# Altium PCB PCBKvant3DPrinter_TopologicalSort.PcbDoc (part 1 of 2)
Units mm, origin at the board's own origin, x right, y up, seen from the top; angles counter-clockwise.
Board outline 112.65 x 119.38 mm, 2 copper layers (Top Layer, Bottom Layer); 226 components, 215 nets, 744 pads, 71 vias.
Unrouted connection lines stored in the file: 213.
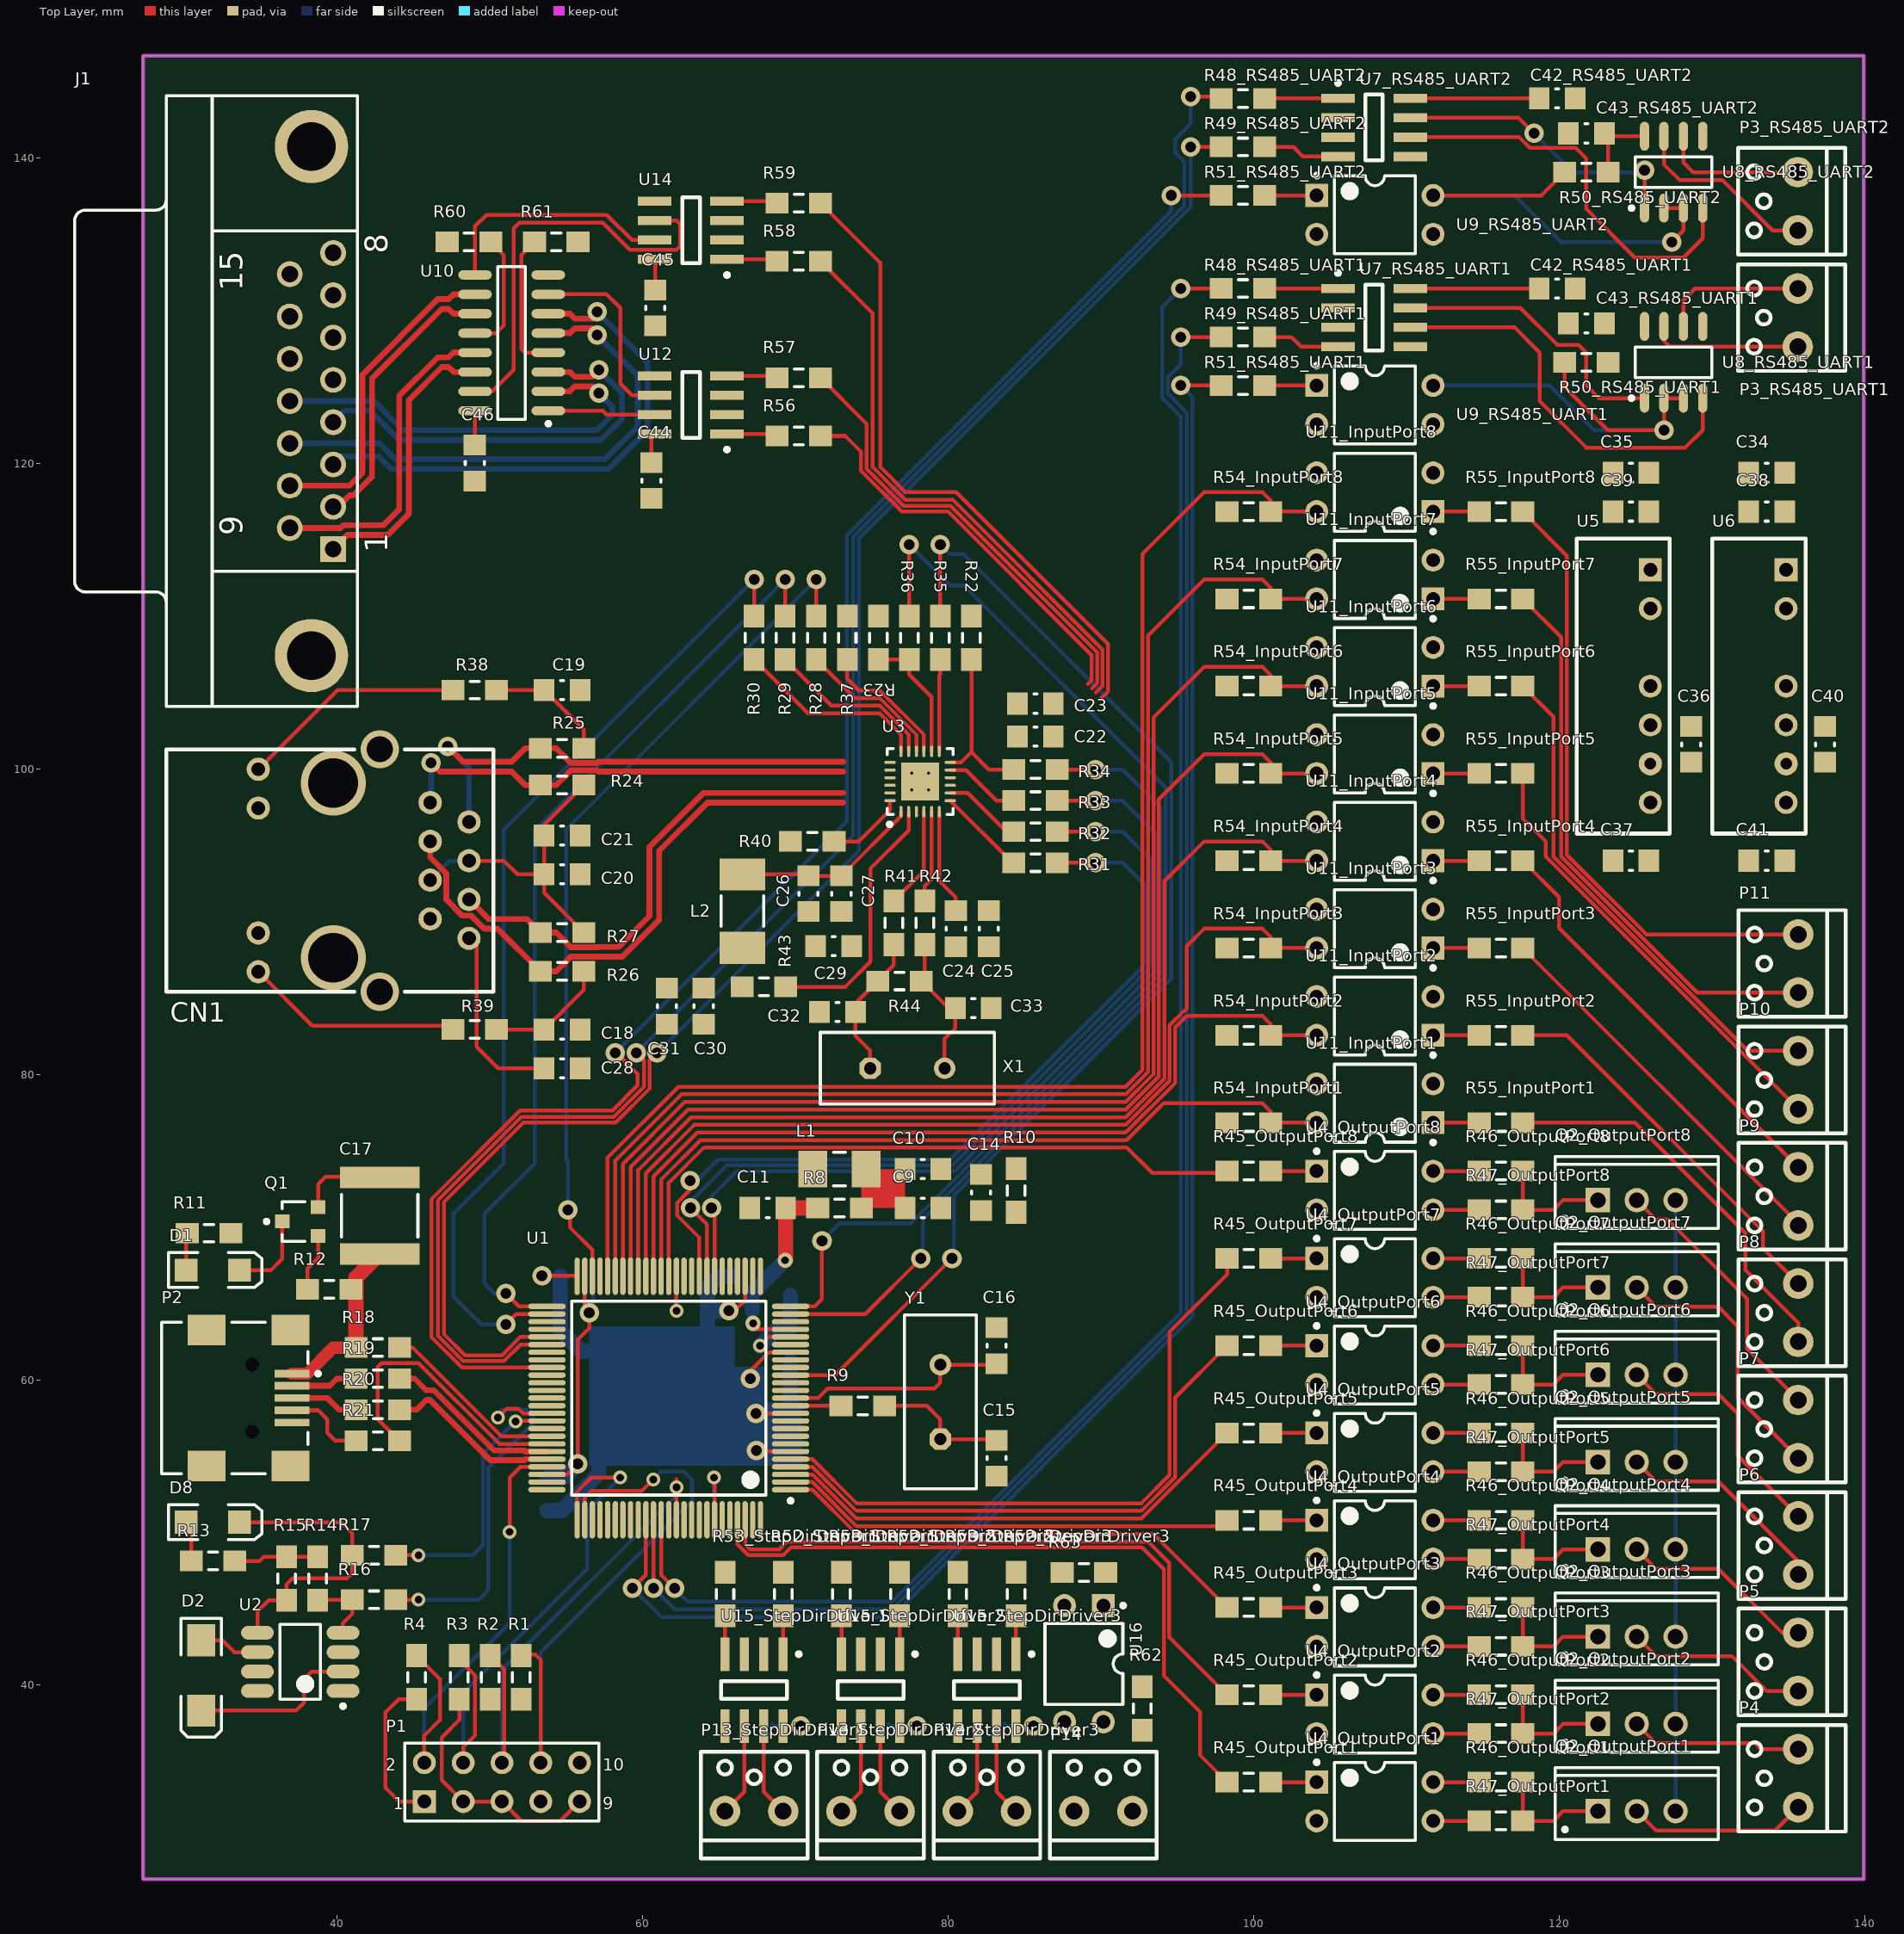
[diagram p0: Top Layer view]
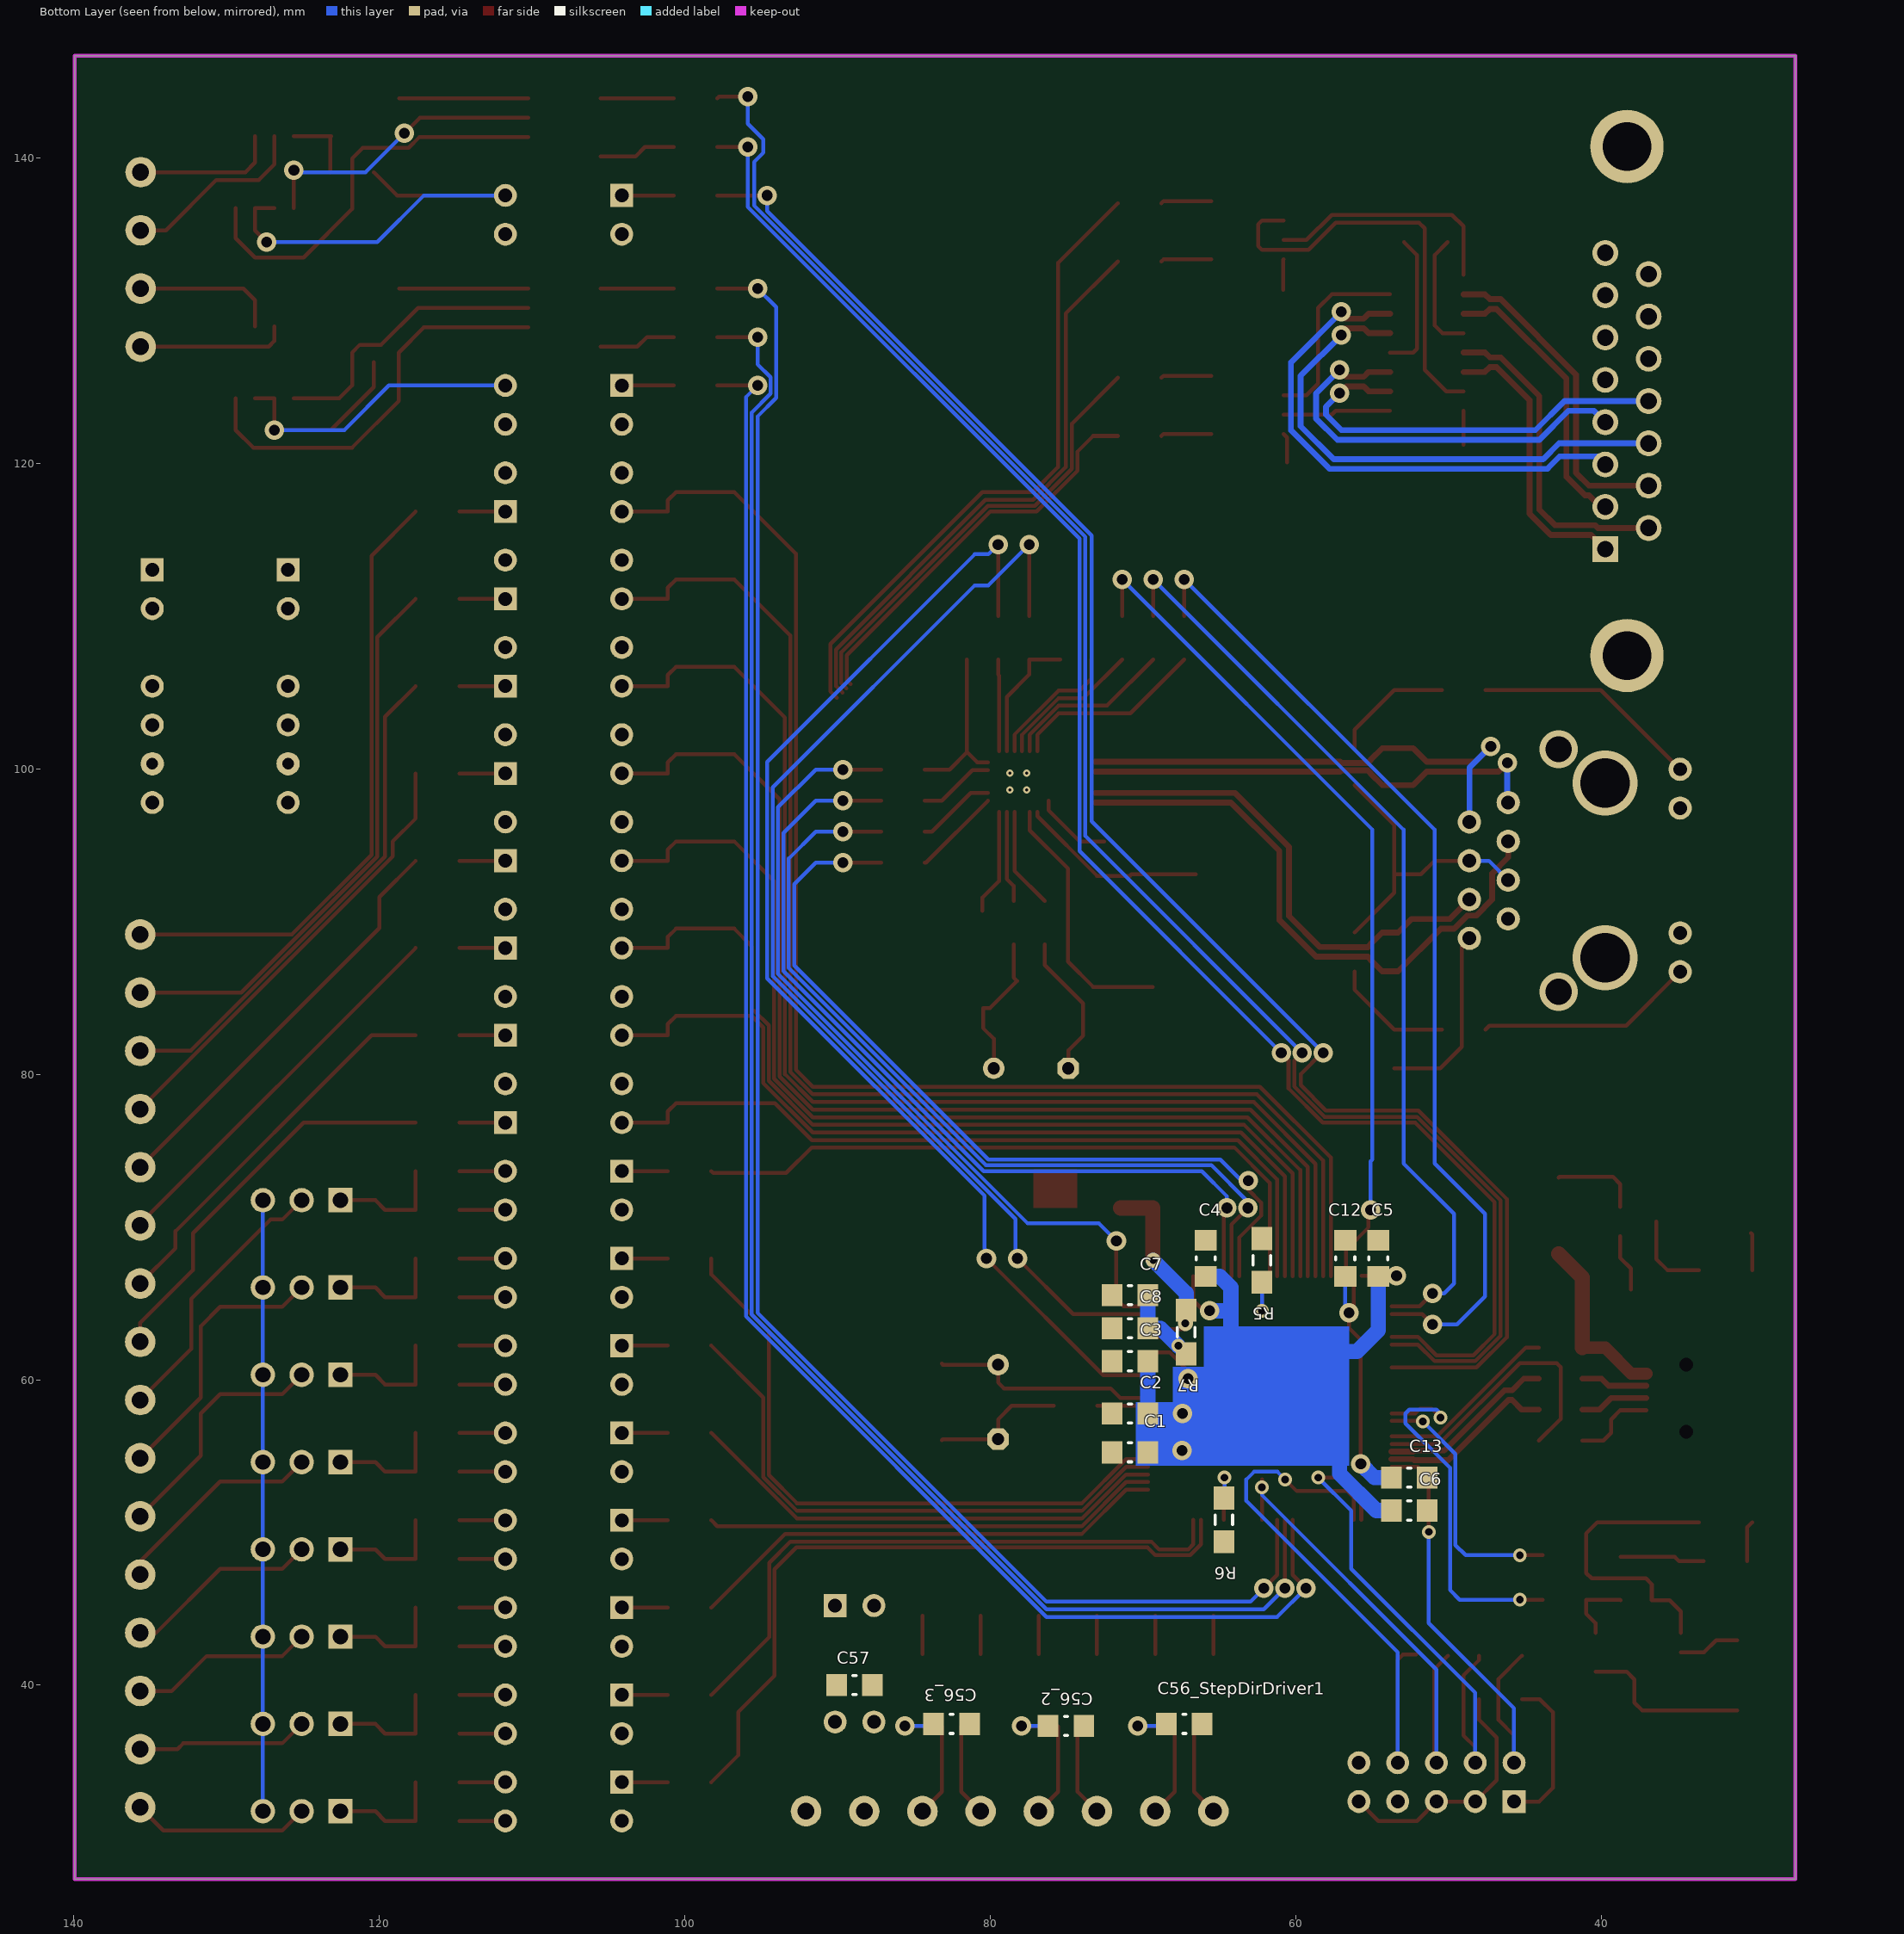
[diagram p1: Bottom Layer view, seen from below]

## Layer stack, top to bottom
Top Solder: solder mask 0.0102, Solder Resist, Dk 3.5
Top Layer: signal copper 0.0356
Dielectric 1: dielectric 0.32, FR-4, Dk 4.8
Bottom Layer: signal copper 0.0356
Bottom Solder: solder mask 0.0102, Solder Resist, Dk 3.5

## Board outline
27.305,27.305 139.954,27.305 139.954,146.685 27.305,146.685

## Design rules (kind name [scope] priority, off if disabled: settings)
Clearance [All] p1: gap=0.1
DiffPairsRouting [All] p1: maxlimit=0.254 minlimit=0.254 mostfreqgap=0.254 toplayer_minwidth=0.381 toplayer_maxwidth=0.381 toplayer_prefwidth=0.381 bottomlayer_minwidth=0.381 bottomlayer_maxwidth=0.381 bottomlayer_prefwidth=0.381 maxuncoupledlength=12.7
MinimumSolderMaskSliver [All] p1: minsoldermaskwidth=0
PolygonConnect [All] p1: connectstyle=Relief reliefconductorwidth=0.254 reliefentries=4 polygonreliefangle="90 Angle" airgapwidth=0.254
RoomDefinition IOPorts [InComponentClass('IOPorts')] p1: confinementstyle=ConfineIn formatcopy=TRUE lockcomponents=FALSE outline 139.319,29.21 139.319,121.031 119.38,121.031 119.38,75.311 131.064,75.311 131.064,29.21
RoomDefinition MCU [InComponentClass('MCU')] p2: confinementstyle=ConfineIn formatcopy=TRUE lockcomponents=FALSE outline 92.71,77.47 42.672,77.47 42.672,27.94 92.71,27.94
RoomDefinition StepDirDriver3 [InComponentClass('StepDirDriver3')] p3: confinementstyle=ConfineIn formatcopy=TRUE lockcomponents=FALSE outline 78.74,48.895 78.74,27.94 86.36,27.94 86.36,48.895
RoomDefinition StepDirDriver2 [InComponentClass('StepDirDriver2')] p4: confinementstyle=ConfineIn formatcopy=TRUE lockcomponents=FALSE outline 71.12,48.895 71.12,27.94 78.74,27.94 78.74,48.895
RoomDefinition StepDirDriver1 [InComponentClass('StepDirDriver1')] p5: confinementstyle=ConfineIn formatcopy=TRUE lockcomponents=FALSE outline 63.5,48.895 63.5,27.94 71.12,27.94 71.12,48.895
RoomDefinition Kvant3DPrinter [InComponentClass('Kvant3DPrinter')] p6: confinementstyle=ConfineIn formatcopy=TRUE lockcomponents=FALSE outline 93.98,27.94 93.98,49.403 85.725,49.403 85.725,27.94
RoomDefinition RS485_UART2 [InComponentClass('RS485_UART2')] p7: confinementstyle=ConfineIn formatcopy=TRUE lockcomponents=FALSE outline 96.52,133.477 139.319,133.477 139.319,145.923 96.52,145.923
RoomDefinition RS485_UART1 [InComponentClass('RS485_UART1')] p8: confinementstyle=ConfineIn formatcopy=TRUE lockcomponents=FALSE outline 96.52,121.031 139.319,121.031 139.319,133.477 96.52,133.477
RoomDefinition OutputPort8 [InComponentClass('OutputPort8')] p9: confinementstyle=ConfineIn formatcopy=TRUE lockcomponents=FALSE outline 96.52,69.215 131.064,69.215 131.064,75.311 96.52,75.311
RoomDefinition OutputPort7 [InComponentClass('OutputPort7')] p10: confinementstyle=ConfineIn formatcopy=TRUE lockcomponents=FALSE outline 96.52,63.5 131.064,63.5 131.064,69.596 96.52,69.596
RoomDefinition OutputPort6 [InComponentClass('OutputPort6')] p11: confinementstyle=ConfineIn formatcopy=TRUE lockcomponents=FALSE outline 96.52,57.785 131.064,57.785 131.064,63.881 96.52,63.881
RoomDefinition OutputPort5 [InComponentClass('OutputPort5')] p12: confinementstyle=ConfineIn formatcopy=TRUE lockcomponents=FALSE outline 96.52,52.07 131.064,52.07 131.064,58.166 96.52,58.166
RoomDefinition OutputPort4 [InComponentClass('OutputPort4')] p13: confinementstyle=ConfineIn formatcopy=TRUE lockcomponents=FALSE outline 96.52,46.355 131.064,46.355 131.064,52.451 96.52,52.451
RoomDefinition OutputPort3 [InComponentClass('OutputPort3')] p14: confinementstyle=ConfineIn formatcopy=TRUE lockcomponents=FALSE outline 96.52,40.64 131.064,40.64 131.064,46.736 96.52,46.736
RoomDefinition OutputPort2 [InComponentClass('OutputPort2')] p15: confinementstyle=ConfineIn formatcopy=TRUE lockcomponents=FALSE outline 96.52,34.925 131.064,34.925 131.064,41.021 96.52,41.021
RoomDefinition OutputPort1 [InComponentClass('OutputPort1')] p16: confinementstyle=ConfineIn formatcopy=TRUE lockcomponents=FALSE outline 96.52,29.21 131.064,29.21 131.064,35.306 96.52,35.306
RoomDefinition LscanDriver [InComponentClass('LscanDriver')] p17: confinementstyle=ConfineIn formatcopy=TRUE lockcomponents=FALSE outline 73.787,145.923 21.971,145.923 21.971,98.933 73.787,98.933
RoomDefinition InputPort8 [InComponentClass('InputPort8')] p18: confinementstyle=ConfineIn formatcopy=TRUE lockcomponents=FALSE outline 96.52,114.935 119.38,114.935 119.38,121.031 96.52,121.031
RoomDefinition InputPort7 [InComponentClass('InputPort7')] p19: confinementstyle=ConfineIn formatcopy=TRUE lockcomponents=FALSE outline 96.52,109.22 119.38,109.22 119.38,115.316 96.52,115.316
RoomDefinition InputPort6 [InComponentClass('InputPort6')] p20: confinementstyle=ConfineIn formatcopy=TRUE lockcomponents=FALSE outline 96.52,103.505 119.38,103.505 119.38,109.601 96.52,109.601
RoomDefinition InputPort5 [InComponentClass('InputPort5')] p21: confinementstyle=ConfineIn formatcopy=TRUE lockcomponents=FALSE outline 96.52,97.79 119.38,97.79 119.38,103.886 96.52,103.886
RoomDefinition InputPort4 [InComponentClass('InputPort4')] p22: confinementstyle=ConfineIn formatcopy=TRUE lockcomponents=FALSE outline 96.52,92.075 119.38,92.075 119.38,98.171 96.52,98.171
RoomDefinition InputPort3 [InComponentClass('InputPort3')] p23: confinementstyle=ConfineIn formatcopy=TRUE lockcomponents=FALSE outline 96.52,86.36 119.38,86.36 119.38,92.456 96.52,92.456
RoomDefinition InputPort2 [InComponentClass('InputPort2')] p24: confinementstyle=ConfineIn formatcopy=TRUE lockcomponents=FALSE outline 96.52,80.645 119.38,80.645 119.38,86.741 96.52,86.741
RoomDefinition InputPort1 [InComponentClass('InputPort1')] p25: confinementstyle=ConfineIn formatcopy=TRUE lockcomponents=FALSE outline 96.52,74.93 119.38,74.93 119.38,81.026 96.52,81.026
RoomDefinition EthernetPHY [InComponentClass('EthernetPHY')] p26: confinementstyle=ConfineIn formatcopy=TRUE lockcomponents=FALSE outline 92.075,114.935 27.94,114.935 27.94,77.47 92.075,77.47
RoomDefinition "USB OTG" [InComponentClass('USB OTG')] p27: confinementstyle=ConfineIn formatcopy=TRUE lockcomponents=FALSE outline 47.625,77.47 27.94,77.47 27.94,27.94 47.625,27.94
RoutingVias [InNetClass('SignalNets')] p1: holewidth=0.5 width=0.9 viastyle="Through Hole" minholewidth=0.5 minwidth=0.9 maxholewidth=0.8 maxwidth=1.2
RoutingVias RoutingVias_PowerNets [InNetClass('AnalogPowerNets')] p2: holewidth=1 width=1.4 viastyle="Through Hole" minholewidth=0.5 minwidth=1 maxholewidth=1 maxwidth=1.4
RoutingVias RoutingVias_AnalogPowerNets [InNetClass('AnalogPowerNets')] p3: holewidth=0.5 width=0.9 viastyle="Through Hole" minholewidth=0.5 minwidth=1 maxholewidth=0.7 maxwidth=1.2
RoutingVias RoutingVias_All [All] p4: holewidth=0.711 width=1.27 viastyle="Through Hole" minholewidth=0.711 minwidth=1.27 maxholewidth=0.711 maxwidth=1.27
SolderMaskExpansion [All] p1: expansion=0.102
Width [InNetClass('SignalNets')] p1: maxlimit=1.016 minlimit=0.254 preferedwidth=0.254
Width Width_AnalogPowerNets [InNetClass('AnalogPowerNet')] p2: maxlimit=1.016 minlimit=0.128 preferedwidth=0.508
Width Width_PowerNets [InNetClass('PowerNet')] p3: maxlimit=1.016 minlimit=0.128 preferedwidth=0.508
Width Width_All [All] p4: maxlimit=0.254 minlimit=0.254 preferedwidth=0.254
27 further rules are at their usual default settings.

## Classes and differential pairs
channel class RS485: RS485_UART1 RS485_UART2
channel class OutputPort: OutputPort1 OutputPort2 OutputPort3 OutputPort4 OutputPort5 OutputPort6 OutputPort7 OutputPort8
channel class InputPort: InputPort1 InputPort2 InputPort3 InputPort4 InputPort5 InputPort6 InputPort7 InputPort8
net class OUT_CH_PO[1..8]: OUT_CH_PO1 OUT_CH_PO2 OUT_CH_PO3 OUT_CH_PO4 OUT_CH_PO5 OUT_CH_PO6 OUT_CH_PO7 OUT_CH_PO8
net class OUT_CH_PI[1..8]: OUT_CH_PI1 OUT_CH_PI2 OUT_CH_PI3 OUT_CH_PI4 OUT_CH_PI5 OUT_CH_PI6 OUT_CH_PI7 OUT_CH_PI8
net class MCU_TX[1..2]: MCU_TX1 MCU_TX2
net class MCU_RX[1..2]: MCU_RX1 MCU_RX2
net class MCU_RTS[1..2]: MCU_RTS1 MCU_RTS2
net class IN_CH_PO[0..8]: IN_CH_PO1 IN_CH_PO2 IN_CH_PO3 IN_CH_PO4 IN_CH_PO5 IN_CH_PO6 IN_CH_PO7 IN_CH_PO8
net class IN_CH_PI[1..15]: IN_CH_PI1 IN_CH_PI2 IN_CH_PI3 IN_CH_PI4 IN_CH_PI5 IN_CH_PI6 IN_CH_PI7 IN_CH_PI8
component class RS485_UART2: C42_RS485_UART2 C43_RS485_UART2 P3_RS485_UART2 R48_RS485_UART2 R49_RS485_UART2 R50_RS485_UART2 R51_RS485_UART2 U7_RS485_UART2 U8_RS485_UART2 U9_RS485_UART2
component class RS485_UART1: C42_RS485_UART1 C43_RS485_UART1 P3_RS485_UART1 R48_RS485_UART1 R49_RS485_UART1 R50_RS485_UART1 R51_RS485_UART1 U7_RS485_UART1 U8_RS485_UART1 U9_RS485_UART1
component class OutputPort8: Q2_OutputPort8 R45_OutputPort8 R46_OutputPort8 R47_OutputPort8 U4_OutputPort8
component class OutputPort7: Q2_OutputPort7 R45_OutputPort7 R46_OutputPort7 R47_OutputPort7 U4_OutputPort7
component class OutputPort6: Q2_OutputPort6 R45_OutputPort6 R46_OutputPort6 R47_OutputPort6 U4_OutputPort6
component class OutputPort5: Q2_OutputPort5 R45_OutputPort5 R46_OutputPort5 R47_OutputPort5 U4_OutputPort5
component class OutputPort4: Q2_OutputPort4 R45_OutputPort4 R46_OutputPort4 R47_OutputPort4 U4_OutputPort4
component class OutputPort3: Q2_OutputPort3 R45_OutputPort3 R46_OutputPort3 R47_OutputPort3 U4_OutputPort3
component class OutputPort2: Q2_OutputPort2 R45_OutputPort2 R46_OutputPort2 R47_OutputPort2 U4_OutputPort2
component class OutputPort1: Q2_OutputPort1 R45_OutputPort1 R46_OutputPort1 R47_OutputPort1 U4_OutputPort1
component class LscanDriver: C44 C45 C46 J1 R56 R57 R58 R59 R60 R61 U10 U12 U14
component class IOPorts: C34 C35 C36 C37 C38 C39 C40 C41 P4 P5 P6 P7 P8 P9 P10 P11 U5 U6
component class InputPort8: R54_InputPort8 R55_InputPort8 U11_InputPort8
component class InputPort7: R54_InputPort7 R55_InputPort7 U11_InputPort7
component class InputPort6: R54_InputPort6 R55_InputPort6 U11_InputPort6
component class InputPort5: R54_InputPort5 R55_InputPort5 U11_InputPort5
component class InputPort4: R54_InputPort4 R55_InputPort4 U11_InputPort4
component class InputPort3: R54_InputPort3 R55_InputPort3 U11_InputPort3
component class InputPort2: R54_InputPort2 R55_InputPort2 U11_InputPort2
component class InputPort1: R54_InputPort1 R55_InputPort1 U11_InputPort1
net class Undefined: AVCC VCC
net class AnalogPowerNet: AVCC NetC7_2
component class EthernetPHY: C18 C19 C20 C21 C22 C23 C24 C25 C26 C27 C28 C29 C30 C31 C32 C33 CN1 L2 R22 R23 R24 R25 R26 R27 R28 R29 R30 R31 R32 R33 R34 R35 R36 R37 R38 R39 R40 R41 R42 R43 R44 U3 X1
net class PowerNet: +5V NetC12_2 NetC17_1 VCC
component class "USB OTG": C17 D1 D2 D8 P2 Q1 R11 R12 R13 R14 R15 R16 R17 R18 R19 R20 R21 U2
component class MCU: C1 C2 C3 C4 C5 C6 C7 C8 C9 C10 C11 C12 C13 C14 C15 C16 L1 P1 R1 R2 R3 R4 R5 R6 R7 R8 R9 R10 U1 Y1
component class Kvant3DPrinter: C57 P14 R62 R63 U16
component class StepDirDriver1: C56_StepDirDriver1 P13_StepDirDriver1 R52_StepDirDriver1 R53_StepDirDriver1 U15_StepDirDriver1
component class StepDirDriver2: C56_2 P13_StepDirDriver2 R52_StepDirDriver2 R53_StepDirDriver2 U15_StepDirDriver2
component class StepDirDriver3: C56_3 P13_StepDirDriver3 R52_StepDirDriver3 R53_StepDirDriver3 U15_StepDirDriver3
net class DIR[1..3]: DIR1 DIR2 DIR3
net class MOTOR_STP[1..3]: MOTOR_STP1 MOTOR_STP2 MOTOR_STP3
channel class StepDirDriver: StepDirDriver1 StepDirDriver2 StepDirDriver3
differential pair LVDS_STROBE: +LVDS_STROBE_P -LVDS_STROBE_N
differential pair LVDS_DATAY: +LVDS_DATAY_P -LVDS_DATAY_N
differential pair LVDS_DATAX: +LVDS_DATAX_P -LVDS_DATAX_N
differential pair LVDS_CLK: +LVDS_CLK_P -LVDS_CLK_N
differential pair USBCON: +USBCON_P -USBCON_N
differential pair USB: +USB_P -USB_N
differential pair ETH_RD: +ETH_RD_P -ETH_RD_N
differential pair ETH_TD: +ETH_TD_P -ETH_TD_N

## Components (designator, comment, footprint, x,y, rotation, side; value= is the part's Value field where it differs from the comment)
C1 "ChipCap" CAP0805 70.866,55.245 r0 bottom
C2 "ChipCap" CAP0805 70.866,57.785 r0 bottom
C3 "ChipCap" CAP0805 70.866,61.214 r0 bottom
C4 "ChipCap" CAP0805 65.913,67.945 r270 bottom
C5 "ChipCap" CAP0805 54.61,67.945 r270 bottom
C6 "ChipCap" CAP0805 52.578,51.435 r0 bottom
C7 "ChipCap" CAP0805 70.866,65.532 r180 bottom
C8 "ChipCap" CAP0805 70.866,63.373 r180 bottom
C9 "ChipCap" CAP0805 78.359,71.247 r180 top
C10 "ChipCap" CAP0805 78.359,73.787 r180 top
C11 "ChipCap" CAP0805 68.199,71.247 r0 top
C12 "ChipCap" CAP0805 56.769,67.945 r270 bottom
C13 "ChipCap" CAP0805 52.578,53.594 r0 bottom
C14 "ChipCap" CAP0805 82.169,72.263 r90 top
C15 "ChipCap" CAP0805 83.185,54.864 r90 top
C16 "ChipCap" CAP0805 83.185,62.23 r270 top
C17 "Cap Pol3" 2220 42.799,70.739 r90 top
C18 "ChipCap" CAP0805 54.737,82.931 r180 top
C19 "ChipCap" CAP0805 54.737,105.156 r180 top
C20 "ChipCap" CAP0805 54.737,93.091 r180 top
C21 "ChipCap" CAP0805 54.737,95.631 r180 top
C22 "ChipCap" CAP0805 85.725,102.108 r180 top
C23 "ChipCap" CAP0805 85.725,104.267 r180 top
C24 "ChipCap" CAP0805 80.518,89.535 r90 top
C25 "ChipCap" CAP0805 82.677,89.535 r90 top
C26 "ChipCap" CAP0805 70.866,91.821 r90 top
C27 "ChipCap" CAP0805 73.025,91.821 r90 top
C28 "ChipCap" CAP0805 54.737,80.391 r180 top
C29 "ChipCap" CAP0805 72.517,88.392 r0 top
C30 "ChipCap" CAP0805 64.008,84.455 r90 top
C31 "ChipCap" CAP0805 61.595,84.455 r90 top
C32 "ChipCap" CAP0805 72.771,84.074 r0 top
C33 "ChipCap" CAP0805 81.661,84.328 r180 top
C34 "ChipCap" CAP0805 133.604,119.38 r0 top
C35 "ChipCap" CAP0805 124.714,119.38 r0 top
C36 "ChipCap" CAP0805 128.651,101.6 r270 top
C37 "ChipCap" CAP0805 124.714,93.98 r180 top
C38 "ChipCap" CAP0805 133.604,116.84 r0 top
C39 "ChipCap" CAP0805 124.714,116.84 r0 top
C40 "ChipCap" CAP0805 137.414,101.6 r270 top
C41 "ChipCap" CAP0805 133.604,93.98 r0 top
C42_RS485_UART1 "ChipCap" CAP0805 119.888,131.445 r180 top (schematic designator C42)
C42_RS485_UART2 "ChipCap" CAP0805 119.888,143.891 r180 top (schematic designator C42)
C43_RS485_UART1 "ChipCap" CAP0805 121.793,129.159 r180 top (schematic designator C43)
C43_RS485_UART2 "ChipCap" CAP0805 121.793,141.605 r180 top (schematic designator C43)
C44 "ChipCap" CAP0805 60.579,118.872 r270 top
C45 "ChipCap" CAP0805 60.833,130.175 r270 top
C46 "ChipCap" CAP0805 49.022,120.015 r90 top
C56_2 "ChipCap" CAP0805 75.057,37.338 r180 bottom (schematic designator C56)
C56_3 "ChipCap" CAP0805 82.55,37.465 r180 bottom (schematic designator C56)
C56_StepDirDriver1 "ChipCap" CAP0805 67.31,37.465 r180 bottom (schematic designator C56)
C57 "ChipCap" CAP0805 88.9,40.005 r180 bottom
CN1 "HY911105A" HR911105A 46.101,90.17 r90 top
D1 "LED2" 3.2X1.6X1.1 31.877,67.183 r0 top
D2 "BZG03C10" DO214 31.115,40.64 r270 top
D8 "LED2" 3.2X1.6X1.1 31.877,50.673 r0 top
J1 "D Connector 15" DSUB1.385-2H15 28.829,124.079 r90 top
L1 "Inductance" CM32 72.898,73.787 r0 top
L2 "Inductance" CM45 66.548,90.678 r90 top
P1 "Header 5X2" HDR2X5 45.72,32.385 r0 top
P2 "mini-USB" USB/SM0.8-6H5 29.21,58.801 r180 top
P3_RS485_UART1 "DG340-3.81" DG340-3.81-02P-00A(H) 135.636,127.635 r90 top (schematic designator P3)
P3_RS485_UART2 "DG340-3.81" DG340-3.81-02P-00A(H) 135.636,135.255 r90 top (schematic designator P3)
P4 "DG340-3.81" DG340-3.81-02P-00A(H) 135.668,32.004 r90 top
P5 "DG340-3.81" DG340-3.81-02P-00A(H) 135.668,39.624 r90 top
P6 "DG340-3.81" DG340-3.81-02P-00A(H) 135.668,47.244 r90 top
P7 "DG340-3.81" DG340-3.81-02P-00A(H) 135.668,54.864 r90 top
P8 "DG340-3.81" DG340-3.81-02P-00A(H) 135.668,62.484 r90 top
P9 "DG340-3.81" DG340-3.81-02P-00A(H) 135.668,70.104 r90 top
P10 "DG340-3.81" DG340-3.81-02P-00A(H) 135.668,77.724 r90 top
P11 "DG340-3.81" DG340-3.81-02P-00A(H) 135.668,85.344 r90 top
P13_StepDirDriver1 "DG340-3.81" DG340-3.81-02P-00A(H) 65.405,31.75 r0 top (schematic designator P13)
P13_StepDirDriver2 "DG340-3.81" DG340-3.81-02P-00A(H) 73.025,31.75 r0 top (schematic designator P13)
P13_StepDirDriver3 "DG340-3.81" DG340-3.81-02P-00A(H) 80.645,31.75 r0 top (schematic designator P13)
P14 "DG340-3.81" DG340-3.81-02P-00A(H) 88.265,31.75 r0 top
Q1 "BC847B" SOT23 37.592,70.358 r90 top
Q2_OutputPort1 "IRFZ44N" TO-220AB 125.095,31.75 r0 top (schematic designator Q2)
Q2_OutputPort2 "IRFZ44N" TO-220AB 125.095,37.465 r0 top (schematic designator Q2)
Q2_OutputPort3 "IRFZ44N" TO-220AB 125.095,43.18 r0 top (schematic designator Q2)
Q2_OutputPort4 "IRFZ44N" TO-220AB 125.095,48.895 r0 top (schematic designator Q2)
Q2_OutputPort5 "IRFZ44N" TO-220AB 125.095,54.61 r0 top (schematic designator Q2)
Q2_OutputPort6 "IRFZ44N" TO-220AB 125.095,60.325 r0 top (schematic designator Q2)
Q2_OutputPort7 "IRFZ44N" TO-220AB 125.095,66.04 r0 top (schematic designator Q2)
Q2_OutputPort8 "IRFZ44N" TO-220AB 125.095,71.755 r0 top (schematic designator Q2)
R1 "ChipRes" RES0805 52.07,40.513 r90 top
R2 "ChipRes" RES0805 50.038,40.513 r90 top
R3 "ChipRes" RES0805 48.006,40.513 r90 top
R4 "ChipRes" RES0805 45.212,40.513 r90 top
R5 "ChipRes" RES0805 62.23,67.818 r270 bottom
R6 "ChipRes" RES0805 64.722,50.826 r270 bottom
R7 "ChipRes" RES0805 67.183,63.119 r270 bottom
R8 "ChipRes" RES0805 72.898,71.247 r0 top
R9 "ChipRes" RES0805 74.422,58.293 r0 top
R10 "ChipRes" RES0805 84.455,72.39 r270 top
R11 "ChipRes" RES0805 31.623,69.596 r0 top
R12 "ChipRes" RES0805 39.497,65.913 r180 top
R13 "ChipRes" RES0805 31.877,48.133 r0 top
R14 "ChipRes" RES0805 38.735,46.99 r90 top
R15 "ChipRes" RES0805 36.703,46.99 r90 top
R16 "ChipRes" RES0805 42.418,45.593 r180 top
R17 "ChipRes" RES0805 42.418,48.514 r180 top
R18 "ChipRes" RES0805 42.672,62.103 r180 top
R19 "ChipRes" RES0805 42.672,60.071 r180 top
R20 "ChipRes" RES0805 42.672,58.039 r180 top
R21 "ChipRes" RES0805 42.672,56.007 r180 top
R22 "ChipRes" RES0805 81.534,108.585 r90 top
R23 "ChipRes" RES0805 75.438,108.585 r90 top
R24 "ChipRes" RES0805 54.737,98.933 r0 top
R25 "ChipRes" RES0805 54.737,101.346 r0 top
R26 "ChipRes" RES0805 54.737,86.741 r0 top
R27 "ChipRes" RES0805 54.737,89.281 r0 top
R28 "ChipRes" RES0805 71.374,108.585 r270 top
R29 "ChipRes" RES0805 69.342,108.585 r270 top
R30 "ChipRes" RES0805 67.31,108.585 r270 top
R31 "ChipRes" RES0805 85.725,93.853 r180 top
R32 "ChipRes" RES0805 85.725,95.885 r180 top
R33 "ChipRes" RES0805 85.725,97.917 r180 top
R34 "ChipRes" RES0805 85.725,99.949 r180 top
R35 "ChipRes" RES0805 79.502,108.585 r270 top
R36 "ChipRes" RES0805 77.47,108.585 r270 top
R37 "ChipRes" RES0805 73.406,108.585 r270 top
R38 "ChipRes" RES0805 49.022,105.156 r180 top
R39 "ChipRes" RES0805 49.022,82.931 r180 top
R40 "ChipRes" RES0805 71.12,95.25 r0 top
R41 "ChipRes" RES0805 76.454,89.916 r90 top
R42 "ChipRes" RES0805 78.486,89.916 r90 top
R43 "ChipRes" RES0805 67.945,85.725 r0 top
R44 "ChipRes" RES0805 76.835,86.106 r0 top
R45_OutputPort1 "ChipRes" RES0805 99.695,33.655 r0 top (schematic designator R45)
R45_OutputPort2 "ChipRes" RES0805 99.695,39.37 r0 top (schematic designator R45)
R45_OutputPort3 "ChipRes" RES0805 99.695,45.085 r0 top (schematic designator R45)
R45_OutputPort4 "ChipRes" RES0805 99.695,50.8 r0 top (schematic designator R45)
R45_OutputPort5 "ChipRes" RES0805 99.695,56.515 r0 top (schematic designator R45)
R45_OutputPort6 "ChipRes" RES0805 99.695,62.23 r0 top (schematic designator R45)
R45_OutputPort7 "ChipRes" RES0805 99.695,67.945 r0 top (schematic designator R45)
R45_OutputPort8 "ChipRes" RES0805 99.695,73.66 r0 top (schematic designator R45)
R46_OutputPort1 "ChipRes" RES0805 116.205,33.655 r0 top (schematic designator R46)
R46_OutputPort2 "ChipRes" RES0805 116.205,39.37 r0 top (schematic designator R46)
R46_OutputPort3 "ChipRes" RES0805 116.205,45.085 r0 top (schematic designator R46)
R46_OutputPort4 "ChipRes" RES0805 116.205,50.8 r0 top (schematic designator R46)
R46_OutputPort5 "ChipRes" RES0805 116.205,56.515 r0 top (schematic designator R46)
R46_OutputPort6 "ChipRes" RES0805 116.205,62.23 r0 top (schematic designator R46)
R46_OutputPort7 "ChipRes" RES0805 116.205,67.945 r0 top (schematic designator R46)
R46_OutputPort8 "ChipRes" RES0805 116.205,73.66 r0 top (schematic designator R46)
R47_OutputPort1 "ChipRes" RES0805 116.205,31.115 r0 top (schematic designator R47)
R47_OutputPort2 "ChipRes" RES0805 116.205,36.83 r0 top (schematic designator R47)
R47_OutputPort3 "ChipRes" RES0805 116.205,42.545 r0 top (schematic designator R47)
R47_OutputPort4 "ChipRes" RES0805 116.205,48.26 r0 top (schematic designator R47)
R47_OutputPort5 "ChipRes" RES0805 116.205,53.975 r0 top (schematic designator R47)
R47_OutputPort6 "ChipRes" RES0805 116.205,59.69 r0 top (schematic designator R47)
R47_OutputPort7 "ChipRes" RES0805 116.205,65.405 r0 top (schematic designator R47)
R47_OutputPort8 "ChipRes" RES0805 116.205,71.12 r0 top (schematic designator R47)
R48_RS485_UART1 "ChipRes" RES0805 99.314,131.445 r0 top (schematic designator R48)
R48_RS485_UART2 "ChipRes" RES0805 99.314,143.891 r0 top (schematic designator R48)
R49_RS485_UART1 "ChipRes" RES0805 99.314,128.27 r0 top (schematic designator R49)
R49_RS485_UART2 "ChipRes" RES0805 99.314,140.716 r0 top (schematic designator R49)
R50_RS485_UART1 "ChipRes" RES0805 121.793,126.619 r0 top (schematic designator R50)
R50_RS485_UART2 "ChipRes" RES0805 121.793,139.065 r0 top (schematic designator R50)
R51_RS485_UART1 "ChipRes" RES0805 99.314,125.095 r0 top (schematic designator R51)
R51_RS485_UART2 "ChipRes" RES0805 99.314,137.541 r0 top (schematic designator R51)
R52_StepDirDriver1 "ChipRes" RES0805 69.215,45.974 r270 top (schematic designator R52)
R52_StepDirDriver2 "ChipRes" RES0805 76.835,45.974 r270 top (schematic designator R52)
R52_StepDirDriver3 "ChipRes" RES0805 84.455,45.974 r270 top (schematic designator R52)
R53_StepDirDriver1 "ChipRes" RES0805 65.405,45.974 r270 top (schematic designator R53)
R53_StepDirDriver2 "ChipRes" RES0805 73.025,45.974 r270 top (schematic designator R53)
R53_StepDirDriver3 "ChipRes" RES0805 80.645,45.974 r270 top (schematic designator R53)
R54_InputPort1 "ChipRes" RES0805 99.695,76.835 r180 top (schematic designator R54)
R54_InputPort2 "ChipRes" RES0805 99.695,82.55 r180 top (schematic designator R54)
R54_InputPort3 "ChipRes" RES0805 99.695,88.265 r180 top (schematic designator R54)
R54_InputPort4 "ChipRes" RES0805 99.695,93.98 r180 top (schematic designator R54)
R54_InputPort5 "ChipRes" RES0805 99.695,99.695 r180 top (schematic designator R54)
R54_InputPort6 "ChipRes" RES0805 99.695,105.41 r180 top (schematic designator R54)
R54_InputPort7 "ChipRes" RES0805 99.695,111.125 r180 top (schematic designator R54)
R54_InputPort8 "ChipRes" RES0805 99.695,116.84 r180 top (schematic designator R54)
R55_InputPort1 "ChipRes" RES0805 116.205,76.835 r0 top (schematic designator R55)
R55_InputPort2 "ChipRes" RES0805 116.205,82.55 r0 top (schematic designator R55)
R55_InputPort3 "ChipRes" RES0805 116.205,88.265 r0 top (schematic designator R55)
R55_InputPort4 "ChipRes" RES0805 116.205,93.98 r0 top (schematic designator R55)
R55_InputPort5 "ChipRes" RES0805 116.205,99.695 r0 top (schematic designator R55)
R55_InputPort6 "ChipRes" RES0805 116.205,105.41 r0 top (schematic designator R55)
R55_InputPort7 "ChipRes" RES0805 116.205,111.125 r0 top (schematic designator R55)
R55_InputPort8 "ChipRes" RES0805 116.205,116.84 r0 top (schematic designator R55)
R56 "ChipRes" RES0805 70.231,121.793 r180 top
R57 "ChipRes" RES0805 70.231,125.603 r180 top
R58 "ChipRes" RES0805 70.231,133.223 r180 top
R59 "ChipRes" RES0805 70.231,137.033 r180 top
R60 "ChipRes" RES0805 48.641,134.493 r0 top
R61 "ChipRes" RES0805 54.356,134.493 r180 top
R62 "ChipRes" RES0805 92.71,38.481 r90 top
R63 "ChipRes" RES0805 88.9,47.371 r0 top
U1 "STM32F407" LQFP100 61.722,58.801 r180 top
U2 "STMPS2141" SOP8 37.592,41.529 r180 top
U3 "LAN8720" QFN50P375X375X85_HS-25N 78.179,99.166 r90 top
U4_OutputPort1 "Optoisolator1" DIP-4 107.95,32.385 r0 top (schematic designator U4)
U4_OutputPort2 "Optoisolator1" DIP-4 107.95,38.1 r0 top (schematic designator U4)
U4_OutputPort3 "Optoisolator1" DIP-4 107.95,43.815 r0 top (schematic designator U4)
U4_OutputPort4 "Optoisolator1" DIP-4 107.95,49.53 r0 top (schematic designator U4)
U4_OutputPort5 "Optoisolator1" DIP-4 107.95,55.245 r0 top (schematic designator U4)
U4_OutputPort6 "Optoisolator1" DIP-4 107.95,60.96 r0 top (schematic designator U4)
U4_OutputPort7 "Optoisolator1" DIP-4 107.95,66.675 r0 top (schematic designator U4)
U4_OutputPort8 "Optoisolator1" DIP-4 107.95,72.39 r0 top (schematic designator U4)
U5 "AM1D-0512" SIP14 125.984,113.03 r0 top
U6 "AM1D-0512" SIP14 134.874,113.03 r0 top
U7_RS485_UART1 "HCPL0631" SOIC8 105.537,131.445 r0 top (schematic designator U7)
U7_RS485_UART2 "HCPL0631" SOIC8 105.537,143.891 r0 top (schematic designator U7)
U8_RS485_UART1 "ADM1485" SO-8_L 127.508,126.619 r90 top (schematic designator U8)
U8_RS485_UART2 "ADM1485" SO-8_L 127.508,139.065 r90 top (schematic designator U8)
U9_RS485_UART1 "Optoisolator1" DIP-4 107.95,123.825 r0 top (schematic designator U9)
U9_RS485_UART2 "Optoisolator1" DIP-4 107.95,136.271 r0 top (schematic designator U9)
U10 "DS90LV031AMS" SOIC16 51.435,127.889 r180 top
U11_InputPort1 "Optoisolator1" DIP-4 107.95,78.105 r180 top (schematic designator U11)
U11_InputPort2 "Optoisolator1" DIP-4 107.95,83.82 r180 top (schematic designator U11)
U11_InputPort3 "Optoisolator1" DIP-4 107.95,89.535 r180 top (schematic designator U11)
U11_InputPort4 "Optoisolator1" DIP-4 107.95,95.25 r180 top (schematic designator U11)
U11_InputPort5 "Optoisolator1" DIP-4 107.95,100.965 r180 top (schematic designator U11)
U11_InputPort6 "Optoisolator1" DIP-4 107.95,106.68 r180 top (schematic designator U11)
U11_InputPort7 "Optoisolator1" DIP-4 107.95,112.395 r180 top (schematic designator U11)
U11_InputPort8 "Optoisolator1" DIP-4 107.95,118.11 r180 top (schematic designator U11)
U12 "HCPL0631" SOIC8 65.532,121.92 r180 top
U14 "HCPL0631" SOIC8 65.532,133.35 r180 top
U15_StepDirDriver1 "HCPL0631" SOIC8 69.215,42.037 r270 top (schematic designator U15)
U15_StepDirDriver2 "HCPL0631" SOIC8 76.835,42.037 r270 top (schematic designator U15)
U15_StepDirDriver3 "HCPL0631" SOIC8 84.455,42.037 r270 top (schematic designator U15)
U16 "Optoisolator1" DIP-4 88.9,41.402 r270 top
X1 "XTAL" BCY-W2/E4.7 77.343,80.391 r0 top
Y1 "ECS-10-13-1" HC-49U 79.502,58.547 r90 top

## Footprints (in the part's own frame and the unit in brackets; to place one, negate y for a bottom-side part, rotate by r counter-clockwise, add the part's x,y. Pads: shape width x height; smd on the part's side, far side on the other; paste and mask are expansions set on the pad)
3.2X1.6X1.1 [mm] "SMT LED; 2 Flat Leads"
  rect 1.5x1.5 smd: 1(-1.75,0) 2(1.75,0)
  silkscreen extent -2.9,-1.15 3.2,1.15
2220 [mm] "Chip Capacitor, Body 5.7x5.0mm, IPC High Density"
  rect 1.4x5.2 smd: 1(-2.5,0) 2(2.5,0)
  silkscreen extent -1.4,-2.5 1.4,2.5, body extent -2.95,-2.63 2.95,2.63, height 1.4
BCY-W2/E4.7 [mm] "Quartz Crystal, Thru-Hole; 2 Leads; Body 11.35 x 4.65 x 13.46 mm (LxWxH max)"
  oct 1.4x1.4 hole 0.8: 1(-2.44,0)
  round 1.4 hole 0.8: 2(2.44,0)
  silkscreen extent -5.7,-2.35 5.7,2.35
CAP0805 [mm]
  rect 1.35x1.45 smd: 1(-1.175,0) 2(1.175,0)
  silkscreen extent -0.1,-0.63 0.1,0.63, body extent -1.4,-0.65 1.4,0.65, height 0.55
CM32 [mm]
  rect 1.9x2.4 smd: 1(-1.75,0) 2(1.75,0)
  silkscreen extent -0.4,-1.1 0.4,1.1, body extent -2.3,-1.2 2.3,1.2, height 0.55
CM45 [mm]
  rect 2.1x2.99 smd: 1(-2.405,0) 2(2.405,0)
  silkscreen extent -1,-1.39 1,1.4, body extent -3,-1.5 3,1.5, height 0.55
DG340-3.81-02P-00A(H) [mm] "Terminal block"
  round 2 hole 1.1: 1(0,0) 2(3.81,0)
  silkscreen extent -1.59,-3.1 5.4,3.9
DIP-4 [mm] "DIP; 4 Leads; Row Spacing 7.62 mm; Pitch 2.54 mm"
  rect 1.5x1.5 hole 0.9: 1(-3.81,1.27)
  round 1.5 hole 0.9: 2(-3.81,-1.27) 3(3.81,-1.27) 4(3.81,1.27)
  silkscreen extent -3.93,-2.55 2.65,2.69, body extent -3.15,-2.5 3.15,2.5, height 5.6
DO214 [mm] "DO-214-AC/SMA; 2 C-Bend Leads; Body 5.3 x 2.6 mm, inc. leads (LxW)"
  rect 2.1x1.85 smd: 1(-2.3,0) 2(2.3,0)
  silkscreen extent -3.75,-1.33 4.05,1.33
DSUB1.385-2H15 [mm] "Connector; D Subminiature; 15 Position; Right Angle; Pitch 1.385 mm"
  rect 1.69x1.69 hole 1.09: 1(-9.695,-10.92)
  round 1.69 hole 1.09: 2(-6.925,-10.92) 3(-4.155,-10.92) 4(-1.385,-10.92) 5(1.385,-10.92) 6(4.155,-10.92) 7(6.925,-10.92) 8(9.695,-10.92) 9(-8.31,-8.08) 10(-5.54,-8.08) 11(-2.77,-8.08) 12(0,-8.08) 13(2.77,-8.08) 14(5.54,-8.08) 15(8.31,-8.08)
  round 4.8 hole 3.18: 16(-16.66,-9.5) 17(16.66,-9.5)
  silkscreen extent -20,-12.5 20,6
HC-49U [mm] "Quartz Crystal, Thru-Hole; 2 Leads; Body 11.35 x 4.65 x 13.46 mm (LxWxH max)"
  oct 1.4x1.4 hole 0.8: 1(-2.44,0)
  round 1.4 hole 0.8: 2(2.44,0)
  silkscreen extent -5.7,-2.35 5.7,2.35
HDR2X5 [mm] "Connector; Header; 5x2 Position"
  rect 1.5x1.5 hole 0.9: 1(0,0)
  round 1.5 hole 0.9: 2(0,2.54) 3(2.54,0) 4(2.54,2.54) 5(5.08,0) 6(5.08,2.54) 7(7.62,0) 8(7.62,2.54) 9(10.16,0) 10(10.16,2.54)
  silkscreen extent -1.27,-1.27 11.43,3.81
HR911105A [mil] "Ethernet connector"
  round 60 hole 35.43: 1(300,0) 2(250,-100) 3(200,0) 4(150,-100) 5(100,0) 6(50,-100) 7(0,0) 8(-50,-100) 9(385.83,442.91) 10(285.83,442.91) 11(-36.22,442.91) 12(-136.22,442.91)
  silkscreen extent -188,-163 437,680
LQFP100 [mm]
  oval 2.45x0.35 smd: 1(-7.975,6) 2(-7.975,5.5) 3(-7.975,5) 4(-7.975,4.5) 5(-7.975,4) 6(-7.975,3.5) 7(-7.975,3) 8(-7.975,2.5) 9(-7.975,2) 10(-7.975,1.5) 11(-7.975,1) 12(-7.975,0.5) 13(-7.975,0) 14(-7.975,-0.5) 15(-7.975,-1) 16(-7.975,-1.5) 17(-7.975,-2) 18(-7.975,-2.5) 19(-7.975,-3) 20(-7.975,-3.5) 21(-7.975,-4) 22(-7.975,-4.5) 23(-7.975,-5) 24(-7.975,-5.5) 25(-7.975,-6) 51(7.975,-6) 52(7.975,-5.5) 53(7.975,-5) 54(7.975,-4.5) 55(7.975,-4) 56(7.975,-3.5) 57(7.975,-3) 58(7.975,-2.5) 59(7.975,-2) 60(7.975,-1.5) 61(7.975,-1) 62(7.975,-0.5) 63(7.975,0) 64(7.975,0.5) 65(7.975,1) 66(7.975,1.5) 67(7.975,2) 68(7.975,2.5) 69(7.975,3) 70(7.975,3.5) 71(7.975,4) 72(7.975,4.5) 73(7.975,5) 74(7.975,5.5) 75(7.975,6)
  oval 0.35x2.45 smd: 26(-6,-7.975) 27(-5.5,-7.975) 28(-5,-7.975) 29(-4.5,-7.975) 30(-4,-7.975) 31(-3.5,-7.975) 32(-3,-7.975) 33(-2.5,-7.975) 34(-2,-7.975) 35(-1.5,-7.975) 36(-1,-7.975) 37(-0.5,-7.975) 38(0,-7.975) 39(0.5,-7.975) 40(1,-7.975) 41(1.5,-7.975) 42(2,-7.975) 43(2.5,-7.975) 44(3,-7.975) 45(3.5,-7.975) 46(4,-7.975) 47(4.5,-7.975) 48(5,-7.975) 49(5.5,-7.975) 50(6,-7.975) 76(6,7.975) 77(5.5,7.975) 78(5,7.975) 79(4.5,7.975) 80(4,7.975) 81(3.5,7.975) 82(3,7.975) 83(2.5,7.975) 84(2,7.975) 85(1.5,7.975) 86(1,7.975) 87(0.5,7.975) 88(0,7.975) 89(-0.5,7.975) 90(-1,7.975) 91(-1.5,7.975) 92(-2,7.975) 93(-2.5,7.975) 94(-3,7.975) 95(-3.5,7.975) 96(-4,7.975) 97(-4.5,7.975) 98(-5,7.975) 99(-5.5,7.975) 100(-6,7.975)
  silkscreen extent -8.1,-6.35 6.35,6.85, body extent -7.15,-7.15 7.15,7.15, height 2.45
QFN50P375X375X85_HS-25N [mm] "QFN, 24-Leads, Body 4.00x4.00mm, Pitch 0.50mm, Thermal Pad 2.50x2.50mm, IPC Medium Density"
  oval 0.75x0.2 smd: 1(-1.975,1.25) 2(-1.975,0.75) 3(-1.975,0.25) 4(-1.975,-0.25) 5(-1.975,-0.75) 6(-1.975,-1.25) 13(1.975,-1.25) 14(1.975,-0.75) 15(1.975,-0.25) 16(1.975,0.25) 17(1.975,0.75) 18(1.975,1.25)
  oval 0.2x0.75 smd: 7(-1.25,-1.975) 8(-0.75,-1.975) 9(-0.25,-1.975) 10(0.25,-1.975) 11(0.75,-1.975) 12(1.25,-1.975) 19(1.25,1.975) 20(0.75,1.975) 21(0.25,1.975) 22(-0.25,1.975) 23(-0.75,1.975) 24(-1.25,1.975)
  rect 2.5x2.5 smd: 25(0,0)
  silkscreen extent -2.92,-2.15 2.15,2.15, body extent -2,-2 2,2, height 0.85
RES0805 [mm] "Chip Resistor, 2-Leads, Body 3.40x1.30mm, IPC Medium Density"
  rect 1.5x1.35 smd: 1(-1.425,0) 2(1.425,0)
  silkscreen extent -0.3,-0.58 0.3,0.58, body extent -1.7,-0.65 1.7,0.65, height 0.55
SIP14 [mm]
  rect 1.5x1.5 hole 0.9: 1(0,0)
  round 1.5 hole 0.9: 2(0,-2.54) 4(0,-7.62) 5(0,-10.16) 7(0,-15.24)
  round 1.524 hole 0.762: 6(0,-12.7)
  silkscreen extent -4.83,-17.27 1.27,2.03
SO-8_L [mm] "8-Pin Small Outline Integrated Circuit 1.27 mm Pitch, IPC High Density"
  oval 1.9x0.6 smd: 1(-2.35,1.905) 2(-2.35,0.635) 3(-2.35,-0.635) 4(-2.35,-1.905) 5(2.35,-1.905) 6(2.35,-0.635) 7(2.35,0.635) 8(2.35,1.905)
  silkscreen extent -2.47,-2.5 1,2.88, body extent -1.95,-2.45 1.95,2.45, height 1.75
SOIC8 [mm]
  rect 2.2x0.6 smd: 1(0,0) 2(0,-1.27) 3(0,-2.54) 4(0,-3.81) 5(4.724,-3.81) 6(4.724,-2.54) 7(4.724,-1.27) 8(4.724,0)
  silkscreen extent -0.13,-4.06 2.92,1.14
SOIC16 [mm] "SOIC, 16-Leads, Body 9.90x3.90mm, Pitch 1.27mm, IPC Medium Density"
  oval 2.2x0.6 smd: 1(-2.4,4.445) 2(-2.4,3.175) 3(-2.4,1.905) 4(-2.4,0.635) 5(-2.4,-0.635) 6(-2.4,-1.905) 7(-2.4,-3.175) 8(-2.4,-4.445) 9(2.4,-4.445) 10(2.4,-3.175) 11(2.4,-1.905) 12(2.4,-0.635) 13(2.4,0.635) 14(2.4,1.905) 15(2.4,3.175) 16(2.4,4.445)
  silkscreen extent -2.53,-5 0.9,5.42, body extent -2,-5 2,5, height 1.75
SOP8 [mm] "SOP, 8-Leads, Body 4.90x3.90mm, Pitch 1.27mm, IPC Medium Density"
  oval 2.15x0.9 smd: 1(-2.8,1.905) 2(-2.8,0.635) 3(-2.8,-0.635) 4(-2.8,-1.905) 5(2.8,-1.905) 6(2.8,-0.635) 7(2.8,0.635) 8(2.8,1.905)
  silkscreen extent -2.93,-2.45 1.33,3.03, body extent -1.95,-2.45 1.95,2.45, height 1.75
SOT23 [mm] "SOT-23; 3 Leads; Body 3.1 x 2.5 mm, inc. leads (LxW max), Alternate Lead Configuration"
  rect 0.9x0.95 smd: 1(0,1.175) 2(0.95,-1.175) 3(-0.95,-1.175)
  silkscreen extent -1.3,-0.3 1.3,2.32
TO-220AB [mm] "TO, Thru-Hole, Vertical, Heatsink Mounted; 3 In-Line Leads; Pitch 2.54 mm"
  rect 1.6x1.6 hole 1: 1(-2.54,0)
  round 1.6 hole 1: 2(0,0) 3(2.54,0)
  silkscreen extent -5.35,-1.85 5.35,2.85, body extent -5.4,-1.9 5.4,2.9, height 19.3
USB/SM0.8-6H5 [mm] "Connector; USB2.0, Type B, SM; 5 Position; Right Angle"
  rect 2.3x0.5 smd: 1(-7.85,-1.6) 2(-7.85,-0.8) 3(-7.85,0) 4(-7.85,0.8) 5(-7.85,1.6)
  rect 2.5x2 smd: 6(-7.75,4.45) 7(-2.25,4.45) 8(-7.75,-4.45) 9(-2.25,-4.45)
  round 0.6 hole 0.9 unplated: MH1(-5.25,2.2) MH2(-5.25,-2.2)
  silkscreen extent -9.68,-4.95 0.7,4.95, body extent -8.9,-4.95 0.7,4.95, height 3.9

## Part data
C1 C2 C3 C4 C5 C6 C7 C8 C9 C10 C11 C12 C13 C14 C15 C16 C18 C19 C20 C21 C22 C23 C24 C25 C26 C27 C28 C29 C30 C31 C32 C33 C34 C35 C36 C37 C38 C39 C40 C41 C42_RS485_UART1 C42_RS485_UART2 C43_RS485_UART1 C43_RS485_UART2 C44 C45 C46 C56_2 C56_3 C56_StepDirDriver1 C57: "Capacitor"
C17: "Polarized Capacitor (Surface Mount)"
D1 D8: "Typical RED, GREEN, YELLOW, AMBER GaAs LED"
D2: "Silicon Zener Diode (3W)"
J1: "Receptacle Assembly, 15 Position, Right Angle"
L1 L2: library part ChipInductance
P1: "Header, 5-Pin, Dual row"
P2: library part miniUSB
P3_RS485_UART1 P3_RS485_UART2 P4 P5 P6 P7 P8 P9 P10 P11 P13_StepDirDriver1 P13_StepDirDriver2 P13_StepDirDriver3 P14: library part DG340-3.81-02P, "Terminal block"
Q1: "SOT23 NPN Silicon Planar General Purpose Transistor"
Q2_OutputPort1 Q2_OutputPort2 Q2_OutputPort3 Q2_OutputPort4 Q2_OutputPort5 Q2_OutputPort6 Q2_OutputPort7 Q2_OutputPort8: "HEXFET Power MOSFET"
R1 R2 R3 R4 R5 R6 R7 R8 R9 R10 R11 R12 R13 R14 R15 R16 R17 R18 R19 R20 R21 R22 R23 R24 R25 R26 R27 R28 R29 R30 R31 R32 R33 R34 R35 R36 R37 R38 R39 R40 R41 R42 R43 R44 R45_OutputPort1 R45_OutputPort2 R45_OutputPort3 R45_OutputPort4 R45_OutputPort5 R45_OutputPort6 R45_OutputPort7 R45_OutputPort8 R46_OutputPort1 R46_OutputPort2 R46_OutputPort3 R46_OutputPort4 R46_OutputPort5 R46_OutputPort6 R46_OutputPort7 R46_OutputPort8 R47_OutputPort1 R47_OutputPort2 R47_OutputPort3 R47_OutputPort4 R47_OutputPort5 R47_OutputPort6 R47_OutputPort7 R47_OutputPort8 R48_RS485_UART1 R48_RS485_UART2 R49_RS485_UART1 R49_RS485_UART2 R50_RS485_UART1 R50_RS485_UART2 R51_RS485_UART1 R51_RS485_UART2 R52_StepDirDriver1 R52_StepDirDriver2 R52_StepDirDriver3 R53_StepDirDriver1 R53_StepDirDriver2 R53_StepDirDriver3 R54_InputPort1 R54_InputPort2 R54_InputPort3 R54_InputPort4 R54_InputPort5 R54_InputPort6 R54_InputPort7 R54_InputPort8 R55_InputPort1 R55_InputPort2 R55_InputPort3 R55_InputPort4 R55_InputPort5 R55_InputPort6 R55_InputPort7 R55_InputPort8 R56 R57 R58 R59 R60 R61 R62 R63: "Chip resistor"
U1: library part STM32F407VGT6, "ST Microcontroller ARM 32-bit Cortex M4"
U2: "Enhanced single channel power switch"
U3: library part LAM8720, "Small Footprint RMII 10/100 Ethernet  Transceiver"
U4_OutputPort1 U4_OutputPort2 U4_OutputPort3 U4_OutputPort4 U4_OutputPort5 U4_OutputPort6 U4_OutputPort7 U4_OutputPort8 U9_RS485_UART1 U9_RS485_UART2 U11_InputPort1 U11_InputPort2 U11_InputPort3 U11_InputPort4 U11_InputPort5 U11_InputPort6 U11_InputPort7 U11_InputPort8 U16: "4-Pin Phototransistor Optocoupler"
U5 U6: "DC-DC 5-12V convertor"
U7_RS485_UART1 U7_RS485_UART2 U12 U14 U15_StepDirDriver1 U15_StepDirDriver2 U15_StepDirDriver3: "2-channel opto-coupler"
U8_RS485_UART1 U8_RS485_UART2: "5 V Low Power  EIA RS-485 Transceiver"
U10: "3V LVDS Quad CMOS Differential Line Driver"
X1: library part "Crystall oscillator", "Quartz crystall oscillator"
Y1: "Crystal Oscillator"

## Via types
v1: diameter 1.27, hole 0.711, Top Layer to Bottom Layer, 50 vias
v2: diameter 0.9, hole 0.5, Top Layer to Bottom Layer, 11 vias
v3: diameter 0.5, hole 0.2, Top Layer to Bottom Layer, 4 vias
v4: diameter 2.5, hole 1.7, Top Layer to Bottom Layer, 2 vias
v5: diameter 4.25, hole 3.25, Top Layer to Bottom Layer, 2 vias
v6: diameter 1, hole 0.5, Top Layer to Bottom Layer, 2 vias

## Nets (pads, with @x,y where several pads share a name; then routed paths per layer and width w, separated by ;. In a path a pad name is that pad's centre, name@x,y a point inside that pad or via, vN(x,y) a via of type N, cw(c..) or ccw(c..) an arc to the next point about the centre after c; other vN are vias at no path point)
#RESET: C14.1 P1.10 R10.2 U1.14
+5V: D2.2 U2.2 | length 11.2
  Top Layer w0.254: D2.2@31.115,38.34 37.324,38.34 37.846,38.862 37.846,40.386 38.354,40.894 U2.2@40.392,40.894
AGND: C36.1 C37.1 C40.1 C41.1 C46.1 C56_2.2 C56_3.2 C56_StepDirDriver1.2 C57.2 J1.5 J1.16 J1.17 P14.2 Q2_OutputPort1.3 Q2_OutputPort2.3 Q2_OutputPort3.3 Q2_OutputPort4.3 Q2_OutputPort5.3 Q2_OutputPort6.3 Q2_OutputPort7.3 Q2_OutputPort8.3 R47_OutputPort1.1 R47_OutputPort2.1 R47_OutputPort3.1 R47_OutputPort4.1 R47_OutputPort5.1 R47_OutputPort6.1 R47_OutputPort7.1 R47_OutputPort8.1 R60.1 U4_OutputPort1.3 U4_OutputPort2.3 U4_OutputPort3.3 U4_OutputPort4.3 U4_OutputPort5.3 U4_OutputPort6.3 U4_OutputPort7.3 U4_OutputPort8.3 U5.5 U6.5 U11_InputPort1.2 U11_InputPort2.2 U11_InputPort3.2 U11_InputPort4.2 U11_InputPort5.2 U11_InputPort6.2 U11_InputPort7.2 U11_InputPort8.2 U12.5 U14.5 U15_StepDirDriver1.5 U15_StepDirDriver2.5 U15_StepDirDriver3.5 U16.3 | length 64.2
  Top Layer w0.254: U4_OutputPort1.3@111.76,31.115 R47_OutputPort1.1@114.78,31.115 ; U4_OutputPort2.3@111.76,36.83 R47_OutputPort2.1@114.78,36.83 ; U4_OutputPort3.3@111.76,42.545 R47_OutputPort3.1@114.78,42.545 ; U4_OutputPort4.3@111.76,48.26 R47_OutputPort4.1@114.78,48.26 ; U4_OutputPort5.3@111.76,53.975 R47_OutputPort5.1@114.78,53.975 ; U4_OutputPort6.3@111.76,59.69 R47_OutputPort6.1@114.78,59.69 ; U4_OutputPort7.3@111.76,65.405 R47_OutputPort7.1@114.78,65.405 ; U4_OutputPort8.3@111.76,71.12 R47_OutputPort8.1@114.78,71.12
  Bottom Layer w0.254: Q2_OutputPort1.3@127.635,31.75 Q2_OutputPort2.3@127.635,37.465 Q2_OutputPort3.3@127.635,43.18 Q2_OutputPort4.3@127.635,48.895 Q2_OutputPort5.3@127.635,54.61 Q2_OutputPort6.3@127.635,60.325 Q2_OutputPort7.3@127.635,66.04 Q2_OutputPort8.3@127.635,71.755
AVCC: C11.2 R7.1 R8.1 R61.1 U1.22 | length 13.4
  Top Layer w0.254: v6(67.238,63.699) 67.238,63.301 U1.22@69.697,63.301
  Top Layer w1: v6(69.342,67.818) 69.374,67.85 C11.2@69.374,71.247 R8.1@71.473,71.247
  Bottom Layer w0.254: R7.1@67.183,64.544 67.183,63.754 v6(67.238,63.699)
  Bottom Layer w1: R7.1@67.183,64.544 67.183,65.659 v6(69.342,67.818)
AVCC5V: C42_RS485_UART1.2 C42_RS485_UART2.2 C43_RS485_UART1.1 C43_RS485_UART2.1 C44.1 C45.1 C46.2 C56_2.1 C56_3.1 C56_StepDirDriver1.1 R50_RS485_UART1.2 R50_RS485_UART2.2 R62.2 U7_RS485_UART1.8 U7_RS485_UART2.8 U8_RS485_UART1.8 U8_RS485_UART2.8 U10.16 U12.8 U14.8 U15_StepDirDriver1.8 U15_StepDirDriver2.8 U15_StepDirDriver3.8 | length 37.2
  Top Layer w0.254: C46.2@49.035,121.203 U10.16@49.035,123.444 ; C44.1@60.579,120.047 60.579,121.691 U12.8@60.808,121.92 ; U14.8@60.808,133.35 60.833,133.325 C45.1@60.833,131.35 ; U15_StepDirDriver1.8@69.215,37.313 70.333,37.313 v1(70.358,37.338) ; U15_StepDirDriver2.8@76.835,37.313 77.953,37.313 v1(77.978,37.338) ; U15_StepDirDriver3.8@84.455,37.313 85.573,37.313 v1(85.598,37.338) ; U7_RS485_UART1.8@110.261,131.445 C42_RS485_UART1.2@118.713,131.445 ; U7_RS485_UART2.8@110.261,143.891 C42_RS485_UART2.2@118.713,143.891 ; R50_RS485_UART2.2@123.218,139.065 123.218,141.355 123.158,141.415 U8_RS485_UART2.8@125.603,141.415
  Bottom Layer w0.254: C56_StepDirDriver1.1@68.485,37.465 68.612,37.338 v1(70.358,37.338) ; C56_2.1@76.105,37.465 C56_2.1@76.232,37.338 v1(77.978,37.338) ; C56_3.1@83.725,37.465 83.852,37.338 v1(85.598,37.338)
DIR1: R53_StepDirDriver1.1 U1.81
DIR2: R53_StepDirDriver2.1 U1.82
DIR3: R53_StepDirDriver3.1 U1.83
ETH_RD_N: CN1.6 R27.1 U3.22 | length 32.7
  Top Layer w0.381: CN1.6@48.641,91.44 49.911,90.17 52.423,90.17 R27.1@53.312,89.281 54.356,89.281 55.121,88.516 55.121,88.486 55.292,88.315 57.032,88.315 57.045,88.328 58.42,88.328 60.452,90.36 60.452,94.878 63.999,98.425 73.152,98.425
ETH_RD_P: CN1.3 R26.1 U3.23 | length 39.4
  Top Layer w0.381: CN1.3@46.101,95.25 46.101,94.198 47.153,93.146 47.153,91.439 48.205,90.387 48.795,90.387 49.648,89.535 50.518,89.535 R26.1@53.312,86.741 54.356,86.741 55.121,87.506 55.121,87.536 55.292,87.706 57.032,87.706 57.045,87.693 58.683,87.693 61.087,90.097 61.087,94.615 64.262,97.79 73.152,97.79
ETH_TD_N: CN1.2 R25.1 U3.20 | length 32.7
  Top Layer w0.381: v1(47.244,101.473) 48.26,100.457 51.435,100.457 52.324,101.346 R25.1@53.312,101.346 54.356,101.346 55.121,100.581 55.121,100.551 55.292,100.38 57.032,100.38 57.109,100.457 73.152,100.457
  Bottom Layer w0.381: v1(47.244,101.473) 48.641,100.076 CN1.2@48.641,96.52
ETH_TD_P: CN1.1 R24.1 U3.21 | length 30.7
  Top Layer w0.381: v1(46.166,100.395) 46.74,99.822 51.435,99.822 52.324,98.933 R24.1@53.312,98.933 54.356,98.933 55.121,99.698 55.121,99.728 55.292,99.898 57.032,99.898 57.109,99.822 73.152,99.822
  Bottom Layer w0.381: CN1.1@46.101,97.79 46.166,97.855 v1(46.166,100.395)